# EAGLE board tssop 16 breakout with onboard 0805 bypass cap (EAGLE 6.5.0)
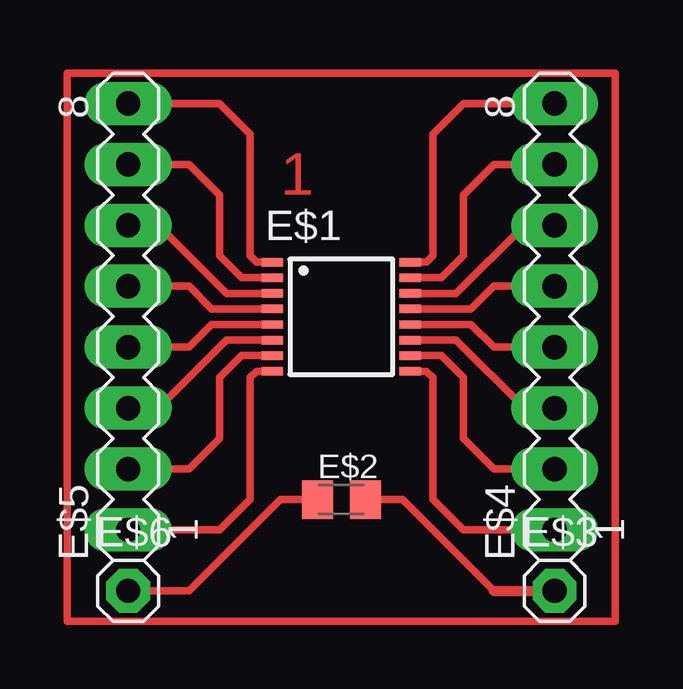
[diagram p0: board, top side]

No outline drawn. Coordinates in mm, seen from the top.
Copper layers (1*16): Top 0.035mm / dielectric 1.5mm / Bottom 0.035mm
Design rules "RobThePyro_home": minimum track width 0.3mm, minimum drill 0.3mm, track to track 0.3mm, track to pad 0.3mm, pad to pad 0.3mm, via to via 0.3mm, smd to smd 8mil, copper to edge 40mil, drill to drill 8mil, minimum pad ring 0.4mm, minimum via ring 0.3mm, stop-mask expansion 4mil, vias tented up to drill 0mil, thermal gap 10mil

## Footprints (pad centres in the part's own frame; a part is rotated, then mirrored left to right if it is on the bottom)
TSSOP16 = smd 0.9 x 0.35: 1 -2.875,2.275; 2 -2.875,1.625; 3 -2.875,0.975; 4 -2.875,0.325; 5 -2.875,-0.325; 6 -2.875,-0.975; 7 -2.875,-1.625; 8 -2.875,-2.275; 9 2.875,-2.275; 10 2.875,-1.625; 11 2.875,-0.975; 12 2.875,-0.325; 13 2.875,0.325; 14 2.875,0.975; 15 2.875,1.625; 16 2.875,2.275
C0805K = smd 1.3 x 1.6: 1 -1,0; 2 1,0
1X01 = drill 1.016 octagon: 1 0,0
MA08-1 = drill 1.016 long: 1 -8.89,0; 2 -6.35,0; 3 -3.81,0; 4 -1.27,0; 5 1.27,0; 6 3.81,0; 7 6.35,0; 8 8.89,0

## Placement (x,y rotation side)
E$1  [TSSOP16]  15.24,13.97 0 top
E$2  [C0805K]  15.24,6.35 0 top
E$3  [1X01]  24.13,2.54 0 top
E$4  [MA08-1]  24.13,13.97 90 top
E$5  [MA08-1]  6.35,13.97 90 top
E$6  [1X01]  6.35,2.54 0 top

## Library data of the parts
E$1 = analog-devices
E$2 = rcl
E$3 E$6 = pinhead
E$4 E$5 = con-lstb

## Nets
S$1: E$1.1 E$5.8
S$2: E$1.2 E$5.7
S$3: E$1.3 E$5.6
S$4: E$1.4 E$5.5
S$5: E$1.5 E$5.4
S$6: E$1.6 E$5.3
S$7: E$1.7 E$5.2
S$8: E$1.8 E$5.1
S$9: E$1.9 E$4.1
S$10: E$1.10 E$4.2
S$11: E$1.11 E$4.3
S$12: E$1.12 E$4.4
S$13: E$1.13 E$4.5
S$14: E$1.14 E$4.6
S$15: E$1.15 E$4.7
S$16: E$1.16 E$4.8
S$17: E$2.1 E$6.1
S$18: E$2.2 E$3.1

## Tracks (layer width: path | path; a pad name or v marks a point on that pad's centre or on a via)
S$1
  Top 0.305: E$1.1 11.7,16.25 11.43,16.51 11.43,21.59 10.16,22.86 E$5.8
S$2
  Top 0.305: E$1.2 11.07,15.6 10.16,16.51 10.16,19.05 8.89,20.32 E$5.7
S$3
  Top 0.305: E$1.3 10.46,14.95 7.62,17.78 E$5.6
S$4
  Top 0.305: E$1.4 9.84,14.29 8.89,15.24 E$5.5
S$5
  Top 0.305: E$1.5 9.84,13.64 8.89,12.7 E$5.4
S$6
  Top 0.305: E$1.6 10.46,12.99 7.62,10.16 E$5.3
S$7
  Top 0.305: E$1.7 11.07,12.35 10.16,11.43 10.16,8.89 8.89,7.62 E$5.2
S$8
  Top 0.305: E$1.8 11.7,11.7 11.43,11.43 11.43,6.35 10.16,5.08 E$5.1
S$9
  Top 0.305: E$1.9 18.79,11.7 19.05,11.43 19.05,6.35 20.32,5.08 E$4.1
S$10
  Top 0.305: E$1.10 19.41,12.35 20.32,11.43 20.32,8.89 21.59,7.62 E$4.2
S$11
  Top 0.305: E$1.11 20.02,12.99 22.86,10.16 E$4.3
S$12
  Top 0.305: E$1.12 20.64,13.64 21.59,12.7 E$4.4
S$13
  Top 0.305: E$1.13 20.64,14.29 21.59,15.24 E$4.5
S$14
  Top 0.305: E$1.14 20.02,14.95 22.86,17.78 E$4.6
S$15
  Top 0.305: E$1.15 19.41,15.6 20.32,16.51 20.32,19.05 21.59,20.32 E$4.7
S$16
  Top 0.305: E$1.16 18.79,16.25 19.05,16.51 19.05,21.59 20.32,22.86 E$4.8
S$17
  Top 0.305: E$2.1 12.7,6.35 8.89,2.54 E$6.1
S$18
  Top 0.305: E$2.2 17.78,6.35 21.59,2.54
  Top 0.406: 21.59,2.54 E$3.1
S$19
  Top 0.305: 3.81,24.13 26.67,24.13 26.67,1.27 3.81,1.27 3.81,24.13

## Text on the board
Top: 1